# Allegro board BackUp.brd
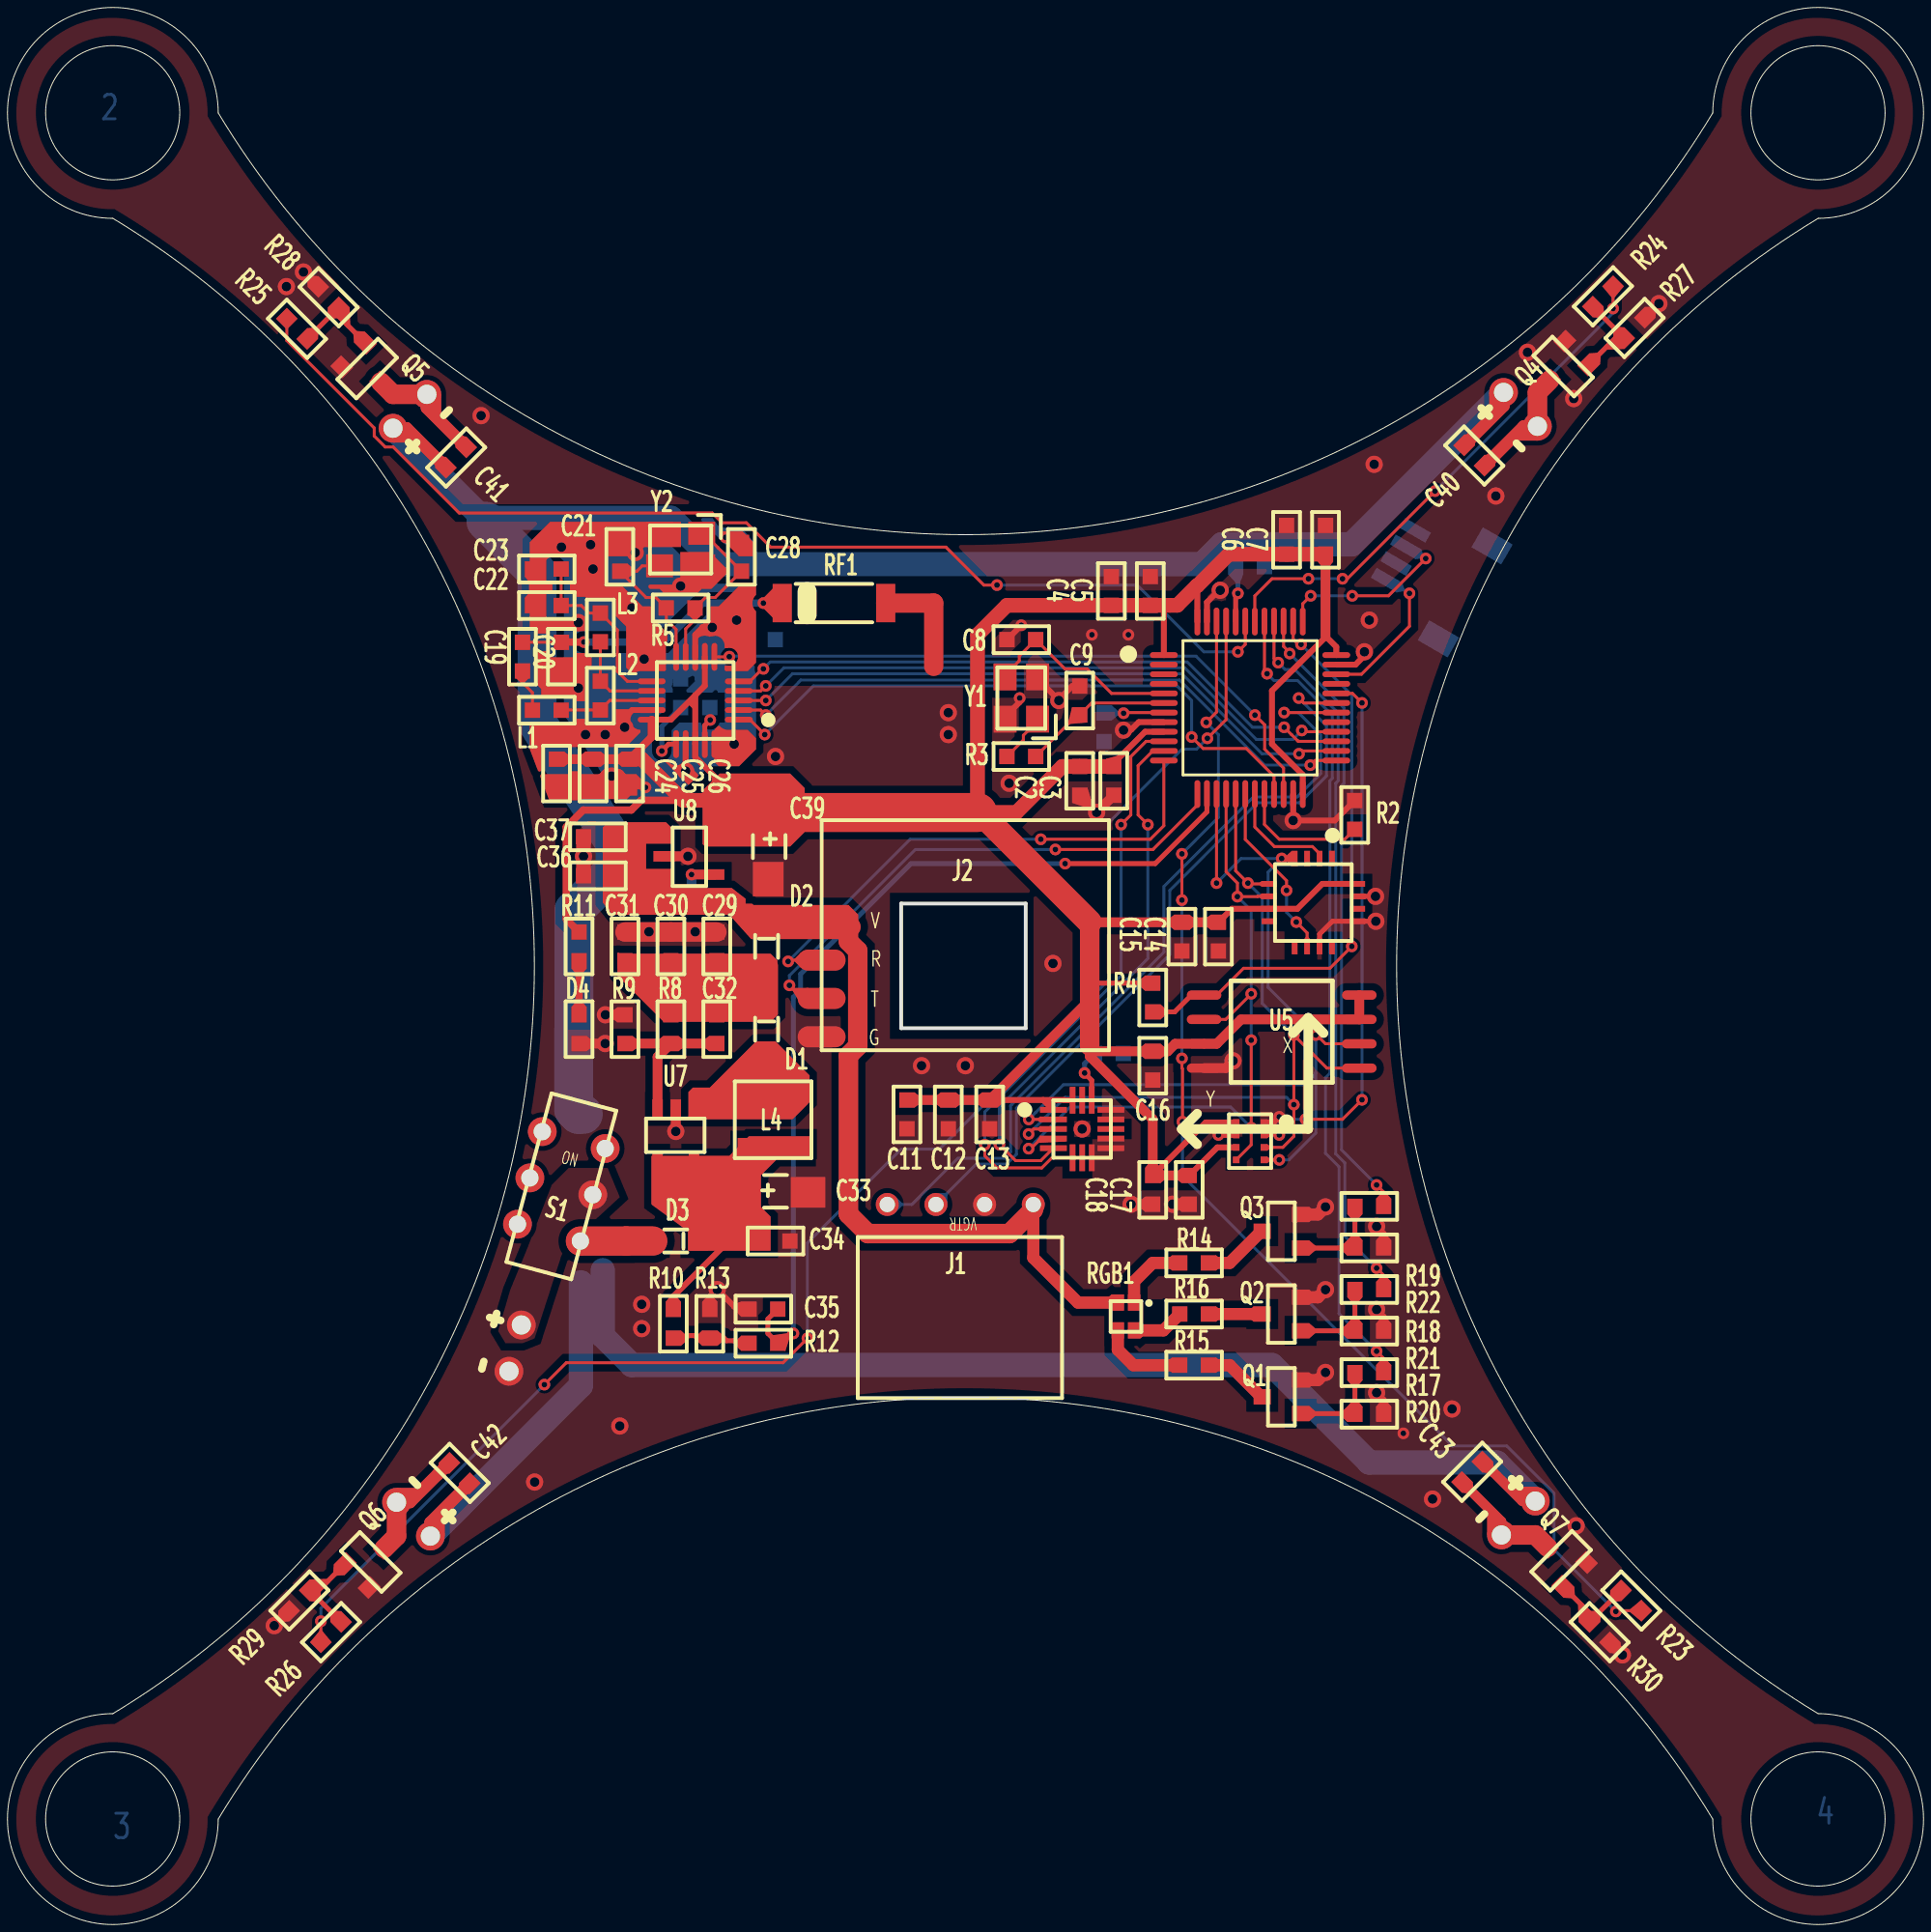
[diagram p0: board, top side]
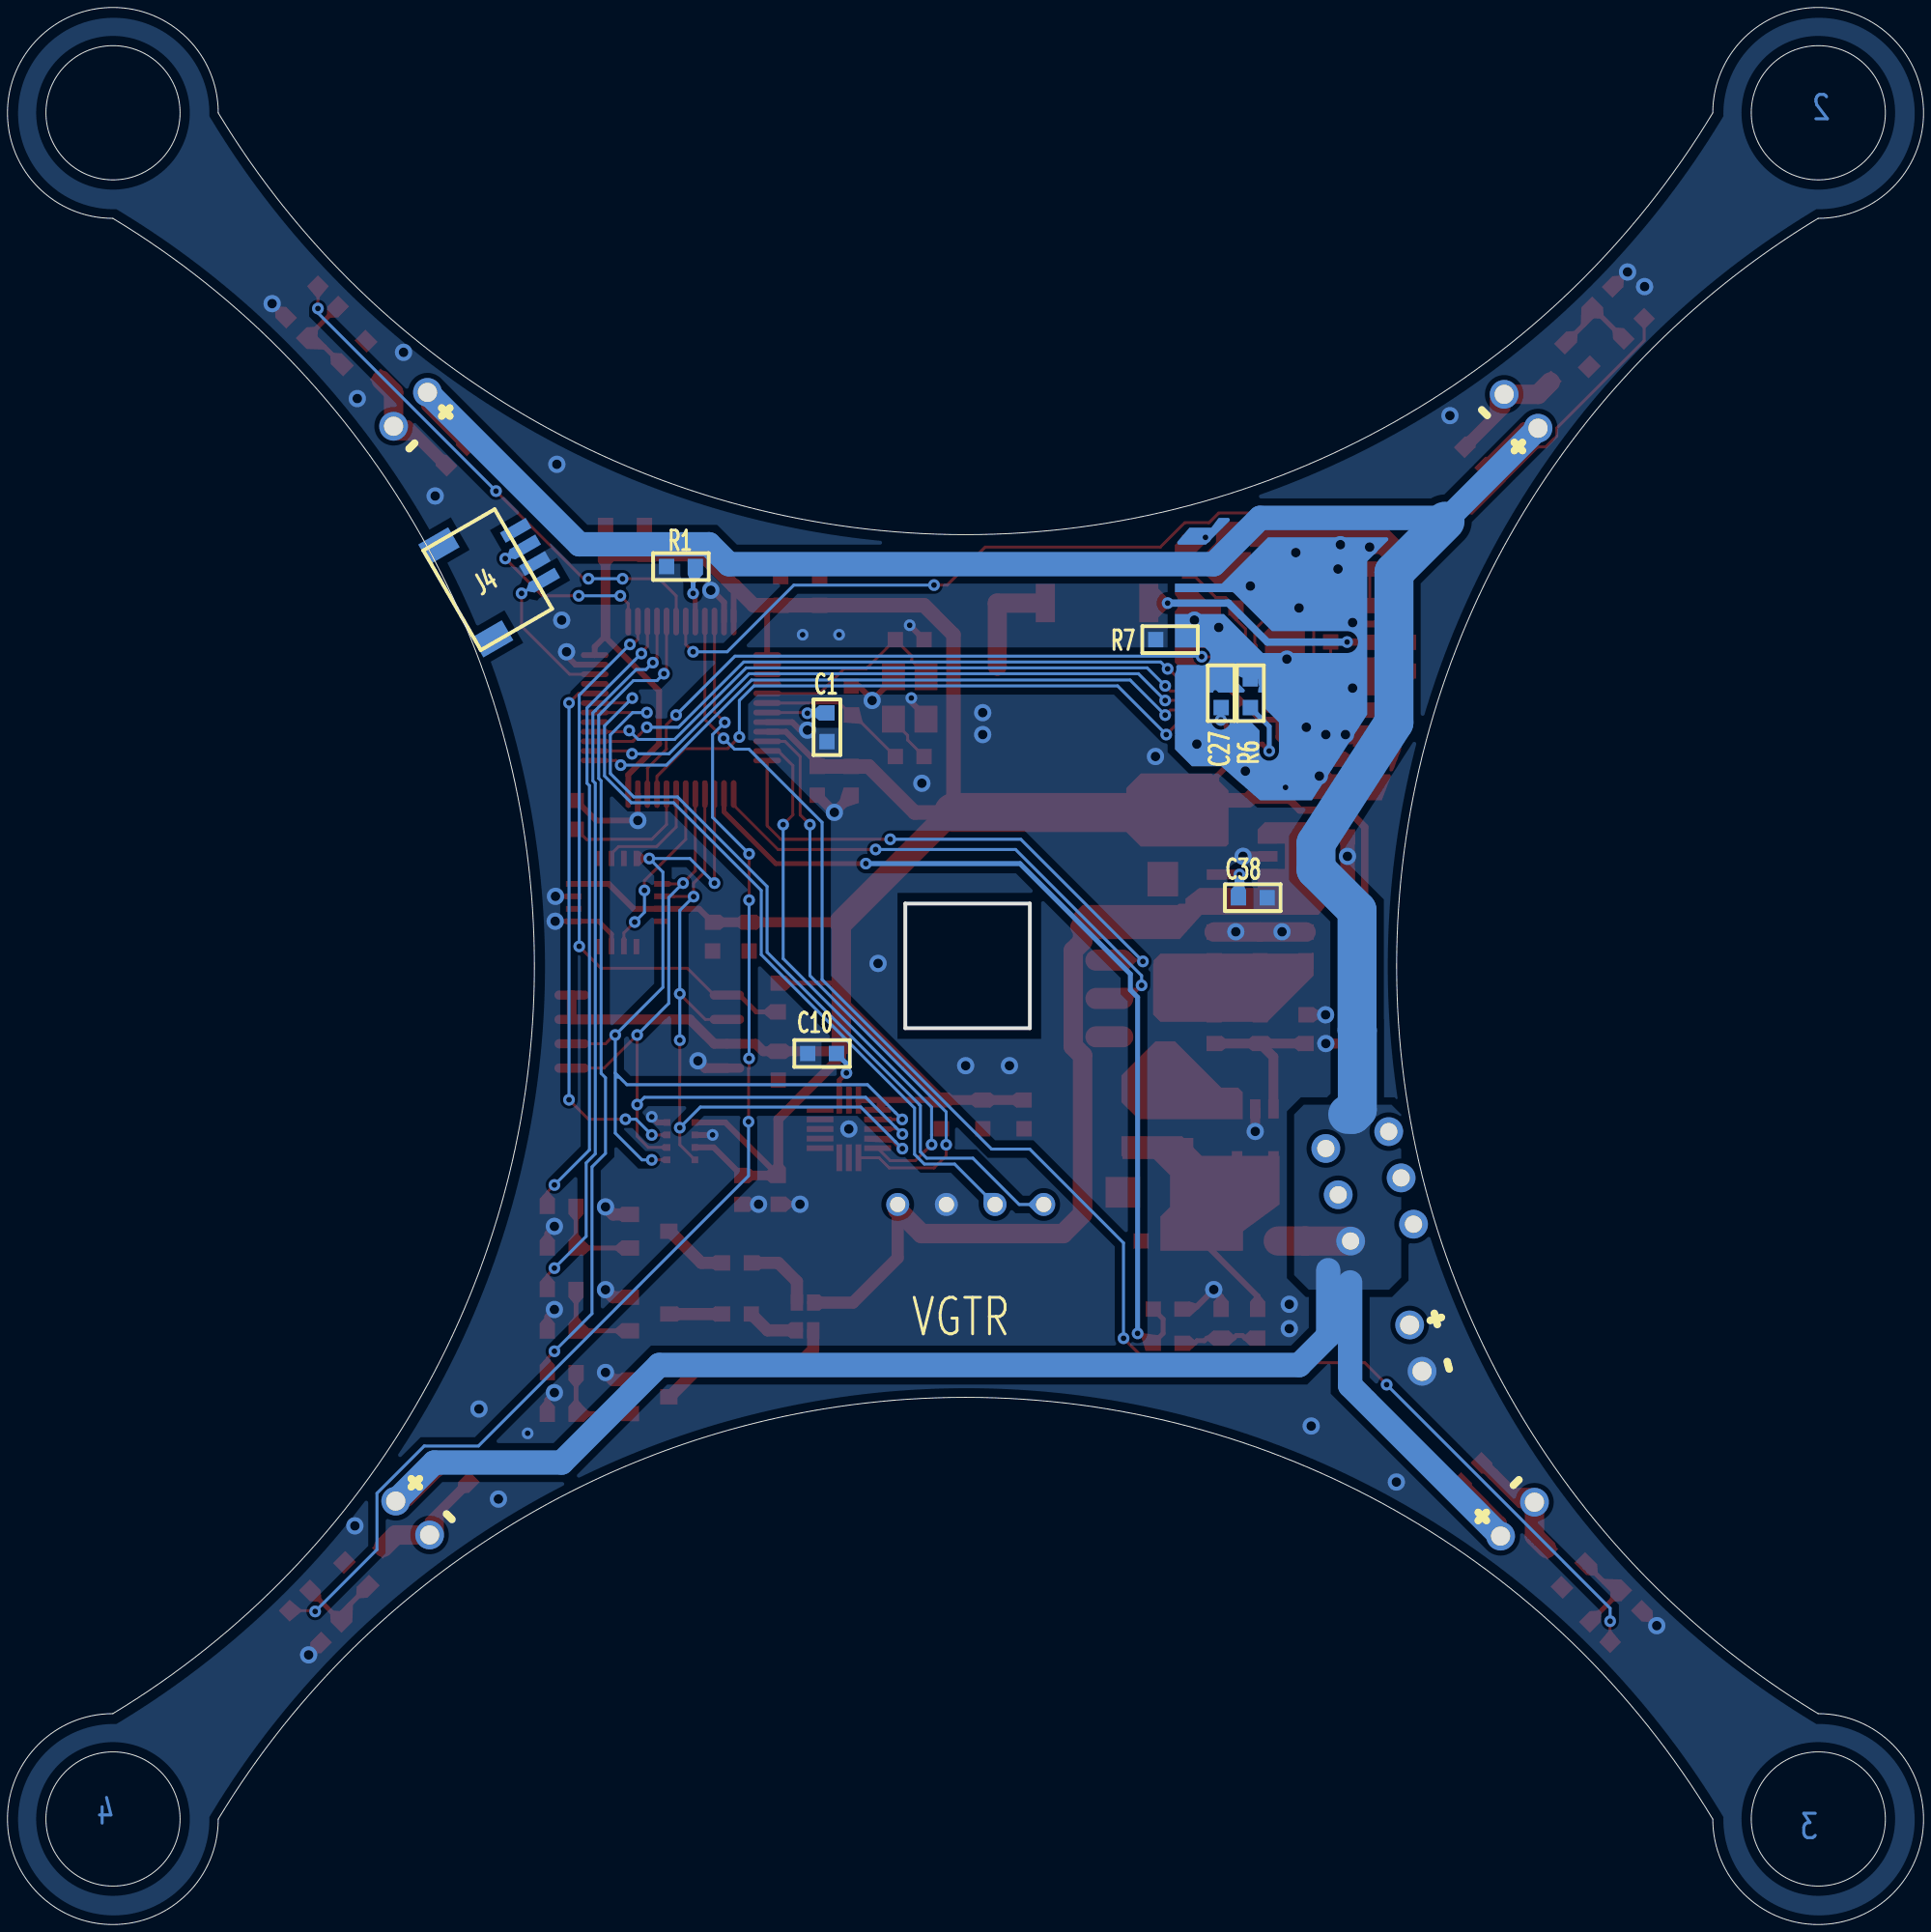
[diagram p1: board, bottom side, seen from below]

Outline 100 x 100 mm; copper layers: TOP, BOTTOM. Coordinates in mm from the lower left corner of the outline.
Outline path: circle c5.49,94.51 r3.5 ; circle c5.49,5.51 r3.5 ; circle c94.49,94.51 r3.5 ; circle c94.49,5.51 r3.5 ; 5.5,89 arc(27.5,50) 5.5,11 arc(1.61,1.61) 11,5.5 arc(50,27.5) 89,5.5 arc(98.39,1.61) 94.5,11 arc(72.5,50) 94.5,89 arc(98.39,98.39) 89,94.5 arc(50,72.5) 11,94.5 arc(1.61,98.39) 5.5,89

## Design rules (mm)
net group POWER: nets GND_SIGNAL VCC_3.3V VCC_5V VCC_IN

## Placement (name value [footprint] x y rotation side)
C1  100nF  [0603]  57.23 62.45 270 bottom
C2  1uF  [0603]  55.96 59.66 270 top
C3  100nF  [0603]  57.74 59.66 270 top
C4  10uF  [0603]  57.61 69.56 90 top
C5  100nF  [0603]  59.64 69.56 90 top
C6  100nF  [0603]  66.76 72.23 90 top
C7  100nF  [0603]  68.79 72.23 90 top
C8  20pF  [0603]  52.91 67.02 180 top
C9  20pF  [0603]  55.96 63.85 90 top
C10  100nF  [0603]  57.48 45.43 0 bottom
C11  2.2uF  [0603]  46.94 42.26 270 top
C12  100nF  [0603]  49.1 42.26 270 top
C13  10nF  [0603]  51.26 42.26 270 top
C14  10uF  [0603]  63.2 51.53 270 top
C15  100nF  [0603]  61.29 51.53 270 top
C16  1uF  [0603]  59.77 44.8 270 top
C17  100nF  [0603]  61.68 38.32 270 top
C18  10uF  [0603]  59.77 38.32 270 top
C19  1.5pF  [0603]  26.88 66.13 90 top
C20  1pF  [0603]  28.91 66.13 270 top
C21  22pF  [0603]  31.96 71.34 90 top
C22  2.2nF  [0603]  28.15 68.8 180 top
C23  4.7pF  [0603]  28.15 70.71 180 top
C24  10uF  [0603]  28.66 60.04 270 top
C25  10nF  [0603]  30.56 60.04 270 top
C26  1nF  [0603]  32.47 60.04 270 top
C27  33nF  [0603]  36.66 64.23 90 bottom
C28  22pF  [0603]  38.31 71.34 90 top
C29  100nF  [0603]  37.02 51.02 90 top
C30  2.2uF  [0603]  34.62 51.02 90 top
C31  10uF  [0603]  32.23 51.02 90 top
C32  22pF  [0603]  37.02 46.7 270 top
C33  T.47uF  [CASE-A-3216]  40.09 38.19 0 top
C34  100nF  [0603]  40.09 35.65 0 top
C35  100nF  [0603]  39.45 32.1 180 top
C36  100nF  [0603]  30.81 56.74 180 top
C37  4.7uF  [0603]  30.81 54.7 180 top
C38  100nF  [0603]  35.01 53.56 180 bottom
C39  T.10uF  [CASE-A-3216]  39.7 56.23 270 top
C40  10uF  [0603]  76.55 76.62 315 top
C41  10uF  [0603]  23.42 76.52 45 top
C42  10uF  [0603]  23.6 23.56 135 top
C43  10uF  [0603]  76.44 23.62 225 top
D1  B5819WS  [SOD-323]  39.62 46.7 90 top
D2  1N5819  [SOD-323]  39.62 51.02 90 top
D3  1N5819  [SOD-323]  34.88 35.65 0 top
D4  RED  [0603]  29.83 46.7 90 top
J1  Bluetooth  [A2541HWR-4P]  49.74 37.56 180 top
J2  Optical-Flow  [UP_FLOW]  49.99 50.01 0 top
J3  Power  [MOTOR]  26.5 30.07 75 top
J4  SWD  [SH1_0]  74.63 70.33 240 bottom
L1  3.9nH  [0603]  28.15 63.34 180 top
L2  8.2nH  [0603]  30.94 64.1 90 top
L3  2.7nH  [0603]  30.94 67.66 90 top
L4  4.7uH  [4_7UH]  39.96 40.48 90 top
M1  MOTOR1  [MOTOR]  78.96 79.04 135 top
M2  MOTOR2  [MOTOR]  21 78.93 225 top
M3  MOTOR3  [MOTOR]  21.19 21.14 315 top
M4  MOTOR4  [MOTOR]  78.85 21.2 45 top
NOREF  -  []  94.52 0 90 top
Q1  SI2310  [SOT23-3]  65.49 27.53 90 top
Q2  SI2310  [SOT23-3]  65.49 31.84 90 top
Q3  SI2310  [SOT23-3]  65.49 36.16 90 top
Q4  SI2310  [SOT23-3]  80.49 80.56 135 top
Q5  SI2310  [SOT23-3]  19.48 80.46 225 top
Q6  SI2310  [SOT23-3]  19.67 19.62 315 top
Q7  SI2310  [SOT23-3]  80.38 19.68 45 top
R1  10K  [0603]  64.85 70.83 0 bottom
R2  10K  [0603]  70.31 57.88 90 top
R3  1M  [0603]  52.91 60.93 180 top
R4  4.7K  [0603]  59.77 48.35 270 top
R5  1M  [0603]  35.13 68.67 0 top
R6  22K  [0603]  35.13 64.23 90 bottom
R7  0  [0603]  39.32 67.02 0 bottom
R8  33K  [0603]  34.62 46.7 270 top
R9  10K  [0603]  32.23 46.7 90 top
R10  2K 1%  [0603]  34.75 31.34 270 top
R11  1K  [0603]  29.83 51.02 270 top
R12  1K  [0603]  39.45 30.32 0 top
R13  1K 1%  [0603]  36.66 31.34 90 top
R14  R50  [0603]  61.93 34.51 0 top
R15  R50  [0603]  61.93 29.18 180 top
R16  R50  [0603]  61.93 31.84 0 top
R17  1K  [0603]  71.07 28.79 180 top
R18  1K  [0603]  71.07 33.12 180 top
R19  1K  [0603]  71.07 37.46 180 top
R20  10K  [0603]  71.07 26.62 0 top
R21  10K  [0603]  71.07 30.96 0 top
R22  10K  [0603]  71.07 35.29 0 top
R23  1K  [0603]  84.75 16.9 135 top
R24  1K  [0603]  83.27 84.93 225 top
R25  1K  [0603]  15.11 83.24 315 top
R26  1K  [0603]  16.89 15.25 45 top
R27  10K  [0603]  84.92 83.28 45 top
R28  10K  [0603]  16.76 84.89 135 top
R29  10K  [0603]  15.24 16.9 225 top
R30  10K  [0603]  83.1 15.25 315 top
RF1  2.4GHz  [RF1]  43.13 68.93 0 top
RGB1  RGB  [RGB1]  58.37 31.72 0 top
S1  SW2*3  [SW]  31.2 40.48 255 top
U1  STM32F103-LQFP48  [LQFP-48]  64.85 63.47 0 top
U2  ICM20602  [LGA-16]  56.09 41.5 0 top
U3  AK8975  [LQFP-16]  68.15 53.31 270 top
U4  SPL06-001  [LGA-8]  64.85 40.86 0 top
U5  W25Q32  [SOIC-8]  66.5 46.58 0 top
U6  nRF24L01+  [QFN-20]  35.89 63.85 180 top
U7  LM27313  [SOT23-5]  34.88 41.24 0 top
U8  MIC5219-3.3V  [SOT23-5]  35.51 55.72 90 top
Y1  8MHz  [8MHZ]  52.91 63.98 90 top
Y2  16MHz  [8MHZ]  35.13 71.72 180 top

## Library data of the parts
C1-C9 = CAP NP_0
C10-C32 C34-C38 = CAP NP_1
C33 C39 = CAP POL_0
C40-C43 = CAP NP
D1 = BZX84C16/SOT_0
D2 D3 = DIODE
D4 = LED
J1 J2 = HEADER 4
J3 M1-M4 = HEADER 2
J4 = HEADER 4_0
L1-L4 = INDUCTOR
Q1-Q7 = MOSFET N_0
R1-R3 = R_0
R4-R30 = R_1
RF1 = RF
RGB1 = RGB
S1 = SW2*3_1
U1 = STM32F103-LQFP48
U2 = ICM20602
U3 = AK8975
U4 = SPL06-001
U5 = W25Q32
U6 = nRF24L01+
U7 = LM27313
U8 = MIC5219-3.3V
Y1 Y2 = XL/SM

## Footprints (pads in the part's own frame, mm; a bottom-side part is the same pattern mirrored in y, then rotated)
4_7UH
  rect 1.1x3.7 smd: 1(0,0) 2(3,0)
8MHZ
  rect 1.4x1.2 smd: 1(-1.1,-0.85) 2(1.1,-0.85) 3(1.1,0.85) 4(-1.1,0.85)
0603
  rect 0.8x0.8 smd: 1(-0.75,0) 2(0.75,0)
A2541HWR-4P
  round 1.2 hole 0.8: 1(-3.8,0) 2(-1.26,0) 3(1.28,0) 4(3.82,0)
CASE-A-3216
  rect 1.8x1.6 smd: 1(-1.7,0) 2(1.7,0)
LGA-8
  rect 0.35x0.35 smd: 1(0.725,0.975) 2(0.725,0.325) 3(0.725,-0.325) 4(0.725,-0.975) 5(-0.725,-0.975) 6(-0.725,-0.325) 7(-0.725,0.325) 8(-0.725,0.975)
LGA-16
  rect 1.4x0.3 smd: 1(-1.5,1) 2(-1.5,0.5) 3(-1.5,0) 4(-1.5,-0.5) 5(-1.5,-1) 9(1.5,-1) 10(1.5,-0.5) 11(1.5,0) 12(1.5,0.5) 13(1.5,1)
  rect 0.3x1.4 smd: 6(-0.5,-1.5) 7(0,-1.5) 8(0.5,-1.5) 14(0.5,1.5) 15(0,1.5) 16(-0.5,1.5)
LQFP-16
  rect 0.8x0.3 smd: 1(-2.3,0.975) 2(-2.3,0.325) 3(-2.3,-0.325) 4(-2.3,-0.975) 9(2.3,-0.975) 10(2.3,-0.325) 11(2.3,0.325) 12(2.3,0.975)
  rect 0.3x0.8 smd: 5(-0.975,-2.3) 6(-0.325,-2.3) 7(0.325,-2.3) 8(0.975,-2.3) 13(0.975,2.3) 14(0.325,2.3) 15(-0.325,2.3) 16(-0.975,2.3)
LQFP-48
  oval 1.45x0.3 smd: 1(-4.5,2.75) 2(-4.5,2.25) 3(-4.5,1.75) 4(-4.5,1.25) 5(-4.5,0.75) 6(-4.5,0.25) 7(-4.5,-0.25) 8(-4.5,-0.75) 9(-4.5,-1.25) 10(-4.5,-1.75) 11(-4.5,-2.25) 12(-4.5,-2.75) 25(4.5,-2.75) 26(4.5,-2.25) 27(4.5,-1.75) 28(4.5,-1.25) 29(4.5,-0.75) 30(4.5,-0.25) 31(4.5,0.25) 32(4.5,0.75) 33(4.5,1.25) 34(4.5,1.75) 35(4.5,2.25) 36(4.5,2.75)
  oval 0.3x1.45 smd: 13(-2.75,-4.5) 14(-2.25,-4.5) 15(-1.75,-4.5) 16(-1.25,-4.5) 17(-0.75,-4.5) 18(-0.25,-4.5) 19(0.25,-4.5) 20(0.75,-4.5) 21(1.25,-4.5) 22(1.75,-4.5) 23(2.25,-4.5) 24(2.75,-4.5) 37(2.75,4.5) 38(2.25,4.5) 39(1.75,4.5) 40(1.25,4.5) 41(0.75,4.5) 42(0.25,4.5) 43(-0.25,4.5) 44(-0.75,4.5) 45(-1.25,4.5) 46(-1.75,4.5) 47(-2.25,4.5) 48(-2.75,4.5)
MOTOR
  round 1.5 hole 1: 1(-1.25,0) 2(1.25,0)
QFN-20
  oval 1.45x0.3 smd: 1(-2.275,1) 2(-2.275,0.5) 3(-2.275,0) 4(-2.275,-0.5) 5(-2.275,-1) 11(2.275,-1) 12(2.275,-0.5) 13(2.275,0) 14(2.275,0.5) 15(2.275,1)
  oval 0.3x1.45 smd: 6(-1,-2.275) 7(-0.5,-2.275) 8(0,-2.275) 9(0.5,-2.275) 10(1,-2.275) 16(1,2.275) 17(0.5,2.275) 18(0,2.275) 19(-0.5,2.275) 20(-1,2.275)
RF1
  rect 1x2 smd: 1(-2.7,0) 2(2.7,0)
RGB1
  rect 0.65x0.85 smd: 1(0.425,0.725) 2(0.425,-0.725) 3(-0.425,-0.725) 4(-0.425,0.725)
SH1_0
  rect 0.6x1.55 smd: 1(1.5,2.2) 2(0.5,2.2) 3(-0.5,2.2) 4(-1.5,2.2)
  rect 1.2x1.8 smd: 5(-2.8,-1.675) 6(2.8,-1.675)
SOD-323
  rect 1x1 smd: 1(1.2,0) 2(-1.2,0)
SOIC-8
  oval 1.8x0.48 smd: 1(-4.05,1.905) 2(-4.05,0.635) 3(-4.05,-0.635) 4(-4.05,-1.905) 5(4.05,-1.905) 6(4.05,-0.635) 7(4.05,0.635) 8(4.05,1.905)
SOT23-3
  rect 0.8x0.9 smd: 1(-0.875,-2) 2(0,0) 3(0.875,-2)
SOT23-5
  rect 0.55x1 smd: 1(0.95,1.3) 2(0,1.3) 3(-0.95,1.3) 4(-0.95,-1.4) 5(0.95,-1.4)
SW
  round 1.5 hole 0.9: 1(0,0) 2(2.5,0) 3(5,0) 4(0,-3.4) 5(2.5,-3.4) 6(5,-3.4)
UP_FLOW
  oval 2.5x1.1 smd: 1(-7.5,-3.7) 2(-7.5,-1.7) 3(-7.5,0.3) 4(-7.5,2.3)

## Nets
GND: C1.2 C2.2 C3.2 C4.2 C5.2 C6.2 C7.2 C8.2 C9.2 C10.2 C11.2 C12.2 C13.2 C14.2 C15.2 C16.2 C17.2 C18.2 C29.2 C30.2 C31.2 C33.2 C34.2 C35.2 C36.2 C37.2 C38.2 C39.2 D4.1(CATHODE) J1.2 J2.1 J3.1 J4.2 Q1.3(SOURCE) Q2.3(SOURCE) Q3.3(SOURCE) Q4.3(SOURCE) Q5.3(SOURCE) Q6.3(SOURCE) Q7.3(SOURCE) R1.2 R2.2 R7.2 R9.2 R13.2 R20.2 R21.2 R22.2 R27.2 R28.2 R29.2 R30.2 U1.8(VSSA) U1.23(VSS_1) U1.35(VSS_2) U1.47(VSS_3) U2.8(FSYNC) U2.9(RESV1) U2.10(RESV2) U2.12(RESV4) U2.13(GND) U2.15(RESV5) U3.11(CAD1) U3.13(CAD0) U3.15(VSS) U4.1(GND) U4.7(GND2) U5.4(GND) U7.2(GND) U8.2(GND) Y1.2 Y1.4
GND_SIGNAL: C20.2 C21.2 C22.2 C23.2 C24.2 C25.2 C26.2 C27.2 C28.2 R6.2 R7.1 U6.8(VSS) U6.14(VSS1) U6.17(VSS2) U6.20(DVSS) Y2.2 Y2.4
VCC_3.3V: C2.1 C3.1 C4.1 C5.1 C6.1 C7.1 C11.1 C12.1 C13.1 C14.1 C15.1 C16.1 C17.1 C18.1 C24.1 C25.1 C26.1 C39.1 R4.1 R11.1 U1.1(VBAT) U1.9(VDDA) U1.24(VDD_1) U1.36(VDD_2) U1.48(VDD_3) U2.1(VDDIO) U2.16(VDD) U3.7(VDDIO) U3.16(VDD) U4.6(VDDIO) U4.8(VDD) U5.3(W\P\) U5.7(H\O\L\D\) U5.8(VCC) U6.7(VDD) U6.15(VDD1) U6.18(VDD2) U8.5(OUT)
VCC_5V: C36.1 C37.1 D2.1(K) J1.1 J2.4 RGB1.4(VCC) U8.1(IN) U8.3(EN)
VCC_BATT: J3.2 S1.2
VCC_IN: C33.1 C34.1 D3.1(K) L4.1 R10.1 U7.4(SD) U7.5(VIN)
VCC_MO: C40.1 C41.1 C42.1 C43.1 D3.2(A) M1.2 M2.2 M3.2 M4.2 S1.3
2: RF1.2
5: J4.5
6: J4.6
AK8975_CS: U1.19(PB1,ADC12_IN9,TIM3_CH4) U3.2(C\S\)
DRDY: U1.18(PB0,ADC12_IN8,TIM3_CH3) U3.10(DRDY)
FLASH_CS: R4.2 U1.38(PA15) U5.1(C\S\)
ICM20602_CS: U1.11(PA1,USART2_RTS,ADC12_IN1,TIM2_C) U2.5(C\S\)
ICM20602_INT: U1.10(PA0,USART2_CTS,ADC12_IN0,TIM2_C) U2.6(INT)
NRF_CE: U1.21(PB10,I2C2_SCL,USART3_TX) U6.1(CE)
NRF_CS: U1.25(PB12,SPI2_NSS,I2C2_SMBAI,USART3) U6.2(C\S\)
NRF_INT: U1.22(PB11,I2C2_SDA) U6.6(IRQ)
OSC_IN: C8.1 U1.5(OSC_IN) Y1.3
OSC_OUT: C9.1 R3.1 U1.6(OSC_OUT)
POWER_MEASURE: C35.1 R12.2 U1.14(PA4,SPI1_NSS,USART2_CK,ADC12_IN)
RGB_B: R17.1 U1.41(PB5,I2C1SMBAI)
RGB_G: R18.1 U1.40(PB4)
RGB_R: R19.1 U1.39(PB3)
SPI1_MISO: U1.16(PA6,SPI1_MISO,ADC12_IN6,TIM3_CH) U2.4(SDO) U3.6(SDO) U4.5(SDO) U5.2(SDO)
SPI1_MOSI: U1.17(PA7,SPI1_MOSI,ADC12_IN7,TIM3_CH) U2.3(SDI) U3.5(SDI) U4.3(SDI) U5.5(SDI)
SPI1_SCK: U1.15(PA5,SPI1_SCK,ADC12_IN5) U2.2(SCK) U3.4(SCK) U4.4(SCK) U5.6(SCK)
SPI2_MISO: U1.27(PB14,SPI2_MISO,TIM1_CH2N) U6.5(MISO)
SPI2_MOSI: U1.28(PB15,SPI2_MOSI,TIM1_CH3N) U6.4(MOSI)
SPI2_SCK: U1.26(PB13,SPI2_SCK,TIM1_CH1N) U6.3(SCK)
SPL06_CS: U1.32(PA11,CANRX,USBDM,TIM1_CH4) U4.2(C\S\)
SWCLK: J4.3 U1.37(PA14,SWCLK)
SWDIO: J4.1 U1.34(PA13,SWDIO)
TIM4_CH1: R24.1 U1.42(PB6,I2C1_SCL,TIM4_CH1)
TIM4_CH2: R25.1 U1.43(PB7,I2C1_SDA,TIM4_CH2)
TIM4_CH3: R26.1 U1.45(PB8,TIM4_CH3)
TIM4_CH4: R23.1 U1.46(PB9,TIM4_CH4)
U1_RX: J1.3 U1.31(PA10,USART1_RX,TIM1_CH3)
U1_TX: J1.4 U1.30(PA9,USART1_TX,TIM1_CH2)
U2_RX: J2.2 U1.13(PA3,USART2_RX,ADC12_IN3,TIM2_CH)
U2_TX: J2.3 U1.12(PA2,USART2_TX,ADC12_IN3,TIM2_CH)
N03518: C1.1 U1.7(NRST)
N03718: R1.1 U1.44(BOOT0)
N03722: R2.1 U1.20(PB2,BOOT1)
N09075: C10.1 U2.14(REGOUT)
N14044: R6.1 U6.16(IREF)
N15484: L1.1 L2.1 U6.13(ANT2)
N15573: C19.1 L1.2
N15577: C19.2 C20.1 RF1.1
N15609: L2.2 L3.1 U6.12(ANT1)
N15655: C22.1 C23.1 L3.2 U6.11(VDDPA)
N16481: C21.1 R5.1 U6.10(XC1) Y2.3
N16490: C28.1 R5.2 U6.9(XC2) Y2.1
N18033: D1.2(ANODE) L4.2 U7.1(SW)
N18173: C29.1 C30.1 C31.1 C32.1 D1.1(CATHODE) D2.2(A) R8.1
N18180: C32.2 R8.2 R9.1 U7.3(FB)
N19990: C38.1 U8.4(BYP)
N023291: R3.2 Y1.1
N24226: Q2.2(DRAIN) R16.2
N24231: Q3.2(DRAIN) R14.2
N24395: Q2.1(GATE) R18.2 R21.1
N24464: Q1.2(DRAIN) R15.1
N25221: Q4.1(GATE) R24.2 R27.1
N25353: C40.2 M1.1 Q4.2(DRAIN)
N25363: C41.2 M2.1 Q5.2(DRAIN)
N25852: C42.2 M3.1 Q6.2(DRAIN)
N25929: C43.2 M4.1 Q7.2(DRAIN)
N30919: R10.2 R12.1 R13.1
N237271: D4.2(ANODE) R11.2
N239990: R14.1 RGB1.1(R)
N239991: R16.1 RGB1.2(G)
N239992: R15.2 RGB1.3(B)
N241640: Q1.1(GATE) R17.2 R20.1
N241820: Q3.1(GATE) R19.2 R22.1
N249670: Q5.1(GATE) R25.2 R28.1
N249850: Q6.1(GATE) R26.2 R29.1
N250030: Q7.1(GATE) R23.2 R30.1
N1269217: C27.1 U6.19(DVDD)

Pads without a net: J4 4; S1 1 4 5 6; U1 2 3 4 29 33; U2 7 11; U3 1 3 8 9 12 14

## Via types
v1: diameter 0.61, hole 0.3, TOP to BOTTOM, 89 vias
v2: diameter 0.9, hole 0.5, TOP to BOTTOM, 68 vias

## Routing (per net, layer and track width the routed paths; a pad name or vN(x,y) marks a point on that pad's centre or on a via; arc(x,y) is an arc through that point)
GND: length 56.9
  TOP w0.254: U3.15 v2(71.4,53.63) ; R30.2 v2(84.28,14.06) ; U3.11 68.48,51.66 69.15,52.33 U3.13 v2(71.41,52.33) ; R29.2 v2(13.92,15.59) ; R27.2 v2(86.19,84.55) ; R28.2 v2(15.45,86.2)
  TOP w0.305: v1(66.37,42.13) 66.37,42.13 66.08,41.84 U4.1 ; R21.2 71.82,31.71 v2(71.45,32.08) ; R13.2 36.66,32.73 v2(37.04,33.12) 37.93,32.23 38.57,32.23 C35.2 ; U1.23 v2(67.1,57.59) 69.27,57.59 R2.2 ; Y1.4 52.06,63 52.83,63.76 v1(52.83,63.98) ; C8.2 v1(52.91,67.77) ; C18.2 v2(58.64,37.57) ; v2(54.87,63.85) 54.87,63.9 ; 54.87,63.9 55.57,64.6 C9.2 ; 54.87,63.9 54.84,63.9 53.76,64.98 Y1.2 ; R20.2 71.82,27.37 v2(71.45,27.74) ; v2(71.45,36.42) 71.82,36.05 R22.2 ; U4.7 v1(63.2,41.19) ; C17.2 v2(60.8,37.57) ; v2(58.25,62.3) 58.27,62.32 58.65,62.32 59.04,62.72 U1.8 ; v2(63.29,69.6) 63.23,69.6 62.6,68.97 U1.47 ; v2(70.82,66.39) 70.82,66.18 70.35,65.72 U1.35
  TOP w0.508: U8.2 v2(35.51,55.72) ; D4.1 v2(31.2,45.95) ; C3.2 v2(56.84,58.01) 55.96,58.9 C2.2 ; v2(63.96,45.05) 63.58,44.67 U5.4 ; R9.2 v2(31.21,47.45) ; U7.2 v2(34.88,41.37)
  TOP w0.635: v2(68.79,37.43) 68.39,37.04 Q3.3 ; v2(68.79,33.11) 68.39,32.72 Q2.3 ; Q1.3 68.39,28.4 v2(68.79,28.8)
  TOP w0.762: C37.2 v2(30.06,55.72) C36.2
  TOP w1.016: C31.2 C30.2 C29.2
  vias: v1(56.6,67.28) v1(58.5,67.28) v1(72.85,25.62) v2(14.56,85.44) v2(24.72,78.71) v2(27.51,23.08) v2(31.96,26) v2(33.1,32.35) v2(33.1,31.08) v2(33.48,51.78) v2(35.89,51.78) v2(40.09,60.93) v2(47.71,44.8) v2(49.1,63.21) v2(49.1,62.07) v2(49.99,44.8) v2(52.28,59.53) v2(54.56,50.13) v2(56.09,41.5) v2(71.07,68.04) v2(71.33,76.17) v2(74.38,22.19) v2(75.39,26.89) v2(77.68,74.52) v2(79.33,82.01) v2(81.74,79.6) v2(81.87,20.8)
GND_SIGNAL: length 21.3
  TOP w0.254: 33.93,72.57 33.77,72.57 v2(32.76,71.56) 32.69,71.56 32.66,71.54 32.51,71.54 C21.2 ; v1(37.48,72.36) 38.05,72.36 38.31,72.1 C28.2 ; v2(35.13,69.82) 35.13,69.87 36.13,70.87 Y2.4
  TOP w0.305: v2(32.21,62.45) 32.21,62.96 32.6,63.35 U6.14 ; U6.17 v2(35.39,60.17) ; U6.8 35.89,67.28 36.28,67.66 ; U6.20 v2(37.93,61.57)
  TOP w0.356: C22.2 C23.2 28.54,71.85 v2(28.91,71.85) ; 36.28,67.66 v2(36.78,67.66) ; C20.2 v2(29.8,64.5)
  TOP w0.762: C24.2 C25.2 30.7,59.29 31.32,59.91 v2(31.53,59.91) 31.83,59.91 31.85,59.88 31.86,59.88 32.45,59.29 C26.2
  vias: v1(33.3,59.31) v2(29.8,67.91) v2(30.17,62.07) v2(30.43,71.98) v2(30.56,70.71) v2(31.2,62.07) v2(32.59,68.67) v2(33.23,66.01) v2(38.05,68.04)
VCC_3.3V: length 187.8
  TOP w0.254: R4.1 56.49,49.1 56.48,49.12
  TOP w0.305: U6.7 36.39,64.62 35.89,64.12 ; U1.36 69.35,66.65 68.79,67.21 68.79,67.15 65.99,64.36 65.99,61.58 67.6,59.97 U1.24 ; C18.1 62.53,41.84 U4.8 ; 36.91,59.53 36.91,59.88 35.89,60.89 U6.18 35.89,64.12 ; U6.15 34.62,62.85 35.89,64.12 ; U1.9 59.37,62.22 57.74,60.58 C3.1 ; U4.6 63.14,40.54 C17.1 ; U1.1 60.35,68.5 60.66,68.81 ; U1.48 62.1,69.83 ; 54.06,43.01 54.57,42.5 U2.1 ; 54.06,43.01 55.15,43.01 55.16,43 U2.16 ; 54.06,43.01 C13.1 ; U3.16 68.62,54.28 67.32,52.98 U3.7 63.9,52.98 C14.1
  TOP w0.381: R11.1 29.16,52.44 29.16,57.24 30.05,58.13 32.56,58.13 33.07,58.64 35.26,58.64
  TOP w0.406: U6.15 33.62,61.94 C26.1
  TOP w0.508: C11.1 C12.1 C13.1 56.48,48.23 ; C24.1 C25.1 C26.1 ; 68.79,67.21 C7.1 ; C14.1 C15.1 56.48,52.28 56.47,52.29 ; C17.1 C18.1 59.77,42 56.48,45.29 56.48,45.83 56.76,45.55 C16.1 60.55,45.55 60.94,45.94 U5.3 63.11,45.94 64.38,47.21 U5.7 U5.8
  TOP w0.762: C7.1 C6.1 63.75,71.48 62.1,69.83 62.07,69.83 61.05,68.81 C5.1 C4.1 52.16,68.81 50.63,67.28 50.63,58.01 ; 36.53,58.64 35.26,58.64 33.11,60.79 C26.1 ; C3.1 C2.1 55.05,60.41 52.65,58.01 50.75,58.01
  TOP w1.016: 56.48,45.83 56.48,52.28
  TOP w1.27: 50.63,58.01 50.75,58.01 56.47,52.29
  TOP w2.032: 50.63,58.01 41.65,58.01
VCC_5V: length 34.2
  TOP w0.635: RGB1.4 55.87,32.44 53.54,34.78 53.54,37.29
  TOP w1.016: J1.1 53.54,37.29 52.29,36.04 44.9,36.04 43.89,37.06 43.89,45.33 44.38,45.81 44.38,50.8 43.89,51.28 43.89,51.9 44.02,52.04
VCC_IN: length 4.3
  TOP w0.305: R10.1 34.75,32.77 37.26,35.27 37.29,35.27
VCC_MO: length 189.7
  TOP w0.508: M4.2 79.05,22.09 77.54,23.59 77.52,23.59 C43.1
  TOP w0.635: C41.1 20.83,78.05 M2.2 ; C40.1 78.08,79.21 M1.2 ; C42.1 22.07,20.97 M3.2
  TOP w1.524: D3.2 32.29,35.65 32.29,35.65 S1.3
  BOTTOM w1.27: M3.2 29.93,28.11 29.93,33.5 ; M2.2 24.97,73.2 25.15,73.37 34.62,73.37 37.04,70.96 62.35,70.96 63.38,72 70.15,72 M1.2 ; M4.2 77.73,24.1 71.07,24.1 65.99,29.18 32.59,29.18 31.07,30.7 31.07,34.13
  BOTTOM w2.032: 30.05,42.26 29.8,42.26 29.55,42.51 29.55,46.63 29.56,46.65 29.56,52.9 31.71,55.04 31.71,56.4 27.64,62.71 27.64,70.53 24.97,73.2
2: length 5.8
  TOP w1: RF1.2 48.34,68.93 48.34,65.63
AK8975_CS: length 5.9
  TOP w0.152: U1.19 65.1,57.25 66.12,56.23 68.11,56.23 68.48,55.86 U3.2
DRDY: length 9.3
  TOP w0.152: U3.10 67.83,51.73 v1(67.26,52.29) ; v1(66.76,53.94) 66.76,54.45 64.6,56.61 U1.18
  BOTTOM w0.152: v1(66.76,53.94) 66.76,52.8 v1(67.26,52.29)
FLASH_CS: length 30.1
  TOP w0.152: v1(70.16,51.02) 69.02,49.88 64.51,49.88 63.11,48.48 U5.1 ; v1(67.51,66.77) 67.37,66.77 67.1,67.04 U1.38
  TOP w0.254: R4.2 60.91,47.6 61.79,48.48 U5.1
  BOTTOM w0.152: v1(70.16,51.02) 70.16,64.13 v1(67.51,66.77)
ICM20602_CS: length 28.3
  TOP w0.152: v1(59.52,57.37) 59.01,57.88 59.01,60.45 59.78,61.22 U1.11 ; v1(51.77,40.68) 52.13,40.32 52.14,40.32 52.61,39.85 53.93,39.85 54.58,40.5 U2.5
  BOTTOM w0.152: v1(59.52,57.37) 59.52,50.39 51.77,42.64 51.77,41.19 v1(51.77,40.68)
ICM20602_INT: length 31.1
  TOP w0.152: v1(51.01,40.68) 51.01,40.1 51.64,39.46 53.98,39.46 54.51,40 U2.6 ; U1.10 59.42,61.72 58.63,60.92 58.63,57.88 v1(58.12,57.37)
  BOTTOM w0.152: v1(51.01,40.68) 51.01,42.39 53.28,44.66 58.12,49.5 v1(58.12,57.37)
NRF_CE: length 33.3
  TOP w0.152: U1.21 66.1,59.9 64.65,61.34 62.4,61.34 62.16,61.58 v1(61.8,61.94) ; U6.1 38.74,62.85 v1(39.52,62.07)
  BOTTOM w0.152: v1(61.8,61.94) 61.8,63.85 61.04,64.61 42.06,64.61 v1(39.52,62.07)
NRF_CS: length 34
  TOP w0.152: U6.2 39.32,63.35 v1(39.58,63.09) ; U1.25 68.24,60.72 68,60.48 v1(67.99,60.48)
  BOTTOM w0.152: v1(67.99,60.48) 65.6,60.48 61.17,64.92 41.41,64.92 v1(39.58,63.09)
NRF_INT: length 34.2
  TOP w0.152: U1.22 66.6,60.32 65.61,61.31 65.61,62.58 v1(65.1,63.09) ; v1(37.67,66.13) 37.66,66.12 U6.6
  BOTTOM w0.152: v1(37.67,66.13) 37.7,66.16 62.03,66.16 v1(65.1,63.09)
OSC_IN: length 10.5
  TOP w0.152: Y1.3 52.06,65.18 52.81,65.92 52.81,66.17 C8.1 55.19,65.5 56.34,65.5 57.62,64.22 U1.5
OSC_OUT: length 7.8
  TOP w0.152: R3.1 55.83,63.1 C9.1 56.58,63.72 U1.6
POWER_MEASURE: length 47.8
  TOP w0.254: U1.14 62.6,58.04 59.9,55.34 v1(55.2,55.34) ; C35.1 39.69,31.58 39.69,30.83 R12.2 40.33,30.45 40.46,30.45 40.84,30.83 v1(41.02,30.83)
  BOTTOM w0.254: v1(41.02,30.83) 41.02,48.37 41.39,48.75 41.39,49.58 47.15,55.34 v1(55.2,55.34)
RGB_B: length 42.8
  TOP w0.152: U1.41 65.6,65.46 65.74,65.32 v1(65.74,65.25) ; v1(71.45,29.9) 71.82,29.53 R17.1
  BOTTOM w0.152: v1(65.74,65.25) 66.1,64.89 67.33,64.89 69.14,63.07 69.14,59.79 69.02,59.66 69.02,44.4 68.79,44.17 68.79,40.23 69.49,39.52 69.49,31.86 v1(71.45,29.9)
RGB_G: length 37.6
  TOP w0.152: U1.40 66.1,66.04 v1(66.32,65.82) ; v1(71.45,34.24) 71.82,33.87 R18.1
  BOTTOM w0.152: v1(71.45,34.24) 69.8,35.9 69.8,39.73 69.32,40.2 69.32,59.53 69.45,59.66 69.45,63.2 69.32,63.33 67.18,65.46 66.68,65.46 v1(66.32,65.82)
RGB_R: length 32.8
  TOP w0.152: U1.39 66.6,66.67 66.91,66.36 66.91,66.31 v1(66.92,66.3) ; R19.1 71.82,38.21 v1(71.45,38.58)
  BOTTOM w0.152: v1(66.92,66.3) 67.28,65.94 69.75,63.46 69.75,59.53 69.62,59.41 69.62,40.4 v1(71.45,38.58)
SPI1_MISO: length 39.1
  TOP w0.152: v1(64.91,46.13) v1(64.91,41.56) 64.91,40.67 U4.5 ; U1.16 63.6,54.91 64.19,54.32 v1(64.19,53.62) 65.23,53.62 65.25,53.63 U3.6 ; U2.4 53.94,41 53.41,40.47 v1(53.29,40.47) ; U5.2 63.58,47.21 64.91,48.54 v1(64.91,48.55)
  BOTTOM w0.152: v1(64.91,46.13) v1(64.91,48.55) 64.91,52.9 v1(64.19,53.62) ; v1(64.91,41.56) 63.83,42.64 55.46,42.64 v1(53.29,40.47)
SPI1_MOSI: length 42.4
  TOP w0.152: U1.17 64.1,54.96 v1(64.74,54.32) 64.85,54.32 64.89,54.28 U3.5 ; U5.5 68.86,44.67 v1(67.14,46.4) v1(67.14,42.77) 67.14,41.12 66.56,40.54 U4.3 ; U2.3 53.55,41.5 53.29,41.24 v1(53.29,41.23)
  BOTTOM w0.152: v1(64.74,54.32) 65.49,53.58 65.49,48.05 v1(67.14,46.4) ; v1(67.14,42.77) 66.76,43.15 55.21,43.15 53.65,41.59 v1(53.29,41.23)
SPI1_SCK: length 48
  TOP w0.152: U5.6 68.79,45.94 68.28,46.45 v1(68.28,46.4) ; v1(66.5,55.61) U3.4 ; U1.15 v1(63.1,54.32) ; U4.4 v1(66.37,39.89) ; v1(53.3,42) 53.3,42 U2.2
  BOTTOM w0.152: v1(53.3,42) 53.66,42.36 55.11,43.81 67.67,43.81 68.28,44.42 ; 68.28,44.42 68.28,41.28 66.88,39.89 v1(66.37,39.89) ; 68.28,44.42 v1(68.28,46.4) 65.79,48.89 65.79,54.9 v1(66.5,55.61) 64.38,55.61 v1(63.1,54.32)
SPI2_MISO: length 33.3
  TOP w0.152: v1(66.63,62.45) 67.02,62.06 67.36,61.72 U1.27 ; U6.5 38.74,64.85 39.4,65.5 v1(39.45,65.5)
  BOTTOM w0.152: v1(66.63,62.45) 64.98,62.45 61.57,65.86 39.81,65.86 v1(39.45,65.5)
SPI2_MOSI: length 33.4
  TOP w0.152: U6.4 39.32,64.35 39.58,64.61 v1(39.58,64.61) ; U1.28 67.62,62.22 v1(67.55,62.28)
  BOTTOM w0.152: v1(67.55,62.28) 67.08,61.82 65.18,61.82 61.45,65.55 40.52,65.55 v1(39.58,64.61)
SPI2_SCK: length 33.6
  TOP w0.152: v1(67.4,61.07) 67.55,61.22 U1.26 ; U6.3 v1(39.58,63.85)
  BOTTOM w0.152: v1(39.58,63.85) 40.97,65.25 61.29,65.25 65.47,61.07 v1(67.4,61.07)
SPL06_CS: length 28.1
  TOP w0.152: v1(67.75,42) 69.68,42 v1(70.69,43.02) ; U4.2 v1(66.37,41.19) ; U1.32 70.2,64.22 v1(70.69,63.72)
  BOTTOM w0.152: v1(67.75,42) 67.19,42 v1(66.37,41.19) ; v1(70.69,43.02) v1(70.69,63.72)
SWCLK: length 9.5
  TOP w0.152: v1(68.01,69.31) 67.6,68.9 U1.37 ; v1(74.02,71.25) 72.07,69.31 v1(70.18,69.31)
  BOTTOM w0.152: v1(74.02,71.25) 73.96,71.25 73.87,71.34 72.97,71.86 J4.3 ; v1(70.18,69.31) v1(68.01,69.31)
SWDIO: length 8
  TOP w0.152: U1.34 70.66,65.22 73.17,67.72 v1(73.17,69.44)
  BOTTOM w0.152: J4.1 72.96,69.56 72.98,69.56 73.11,69.44 v1(73.17,69.44)
TIM4_CH1: length 27.5
  TOP w0.152: v1(74.5,74.77) 69.93,70.2 v1(69.68,70.2) ; R24.1 v1(83.8,84.3) ; U1.42 65.1,69.31 65.99,70.2 v1(67.9,70.2)
  BOTTOM w0.152: v1(83.8,84.3) 83.8,84.06 v1(74.5,74.77) ; v1(69.68,70.2) v1(67.9,70.2)
TIM4_CH2: length 59.5
  TOP w0.152: v1(64.22,66.39) 64.6,66.77 U1.43 ; R25.1 14.58,82.62 19.14,78.06 19.14,77.65 19.71,77.07 20.13,77.07 23.58,73.63 36.78,73.63 37.29,73.12 38.56,73.12 39.83,71.85 48.98,71.85 50.96,69.87 v1(51.64,69.87)
  BOTTOM w0.152: v1(64.22,66.39) 62.44,66.39 58.96,69.87 v1(51.64,69.87)
TIM4_CH3: length 81.1
  TOP w0.152: v1(41.75,30.58) 40.48,29.3 29.16,29.3 v1(28.02,28.16) ; U1.45 63.6,62.85 v1(62.62,61.88) ; R26.1 v1(16.36,15.82)
  BOTTOM w0.152: v1(41.75,30.58) 41.75,35.55 46.64,40.45 48.64,40.45 57.48,49.29 57.48,57.49 61.3,61.31 62.06,61.31 v1(62.62,61.88) ; v1(28.02,28.16) 16.36,16.5 v1(16.36,15.82)
TIM4_CH4: length 65.3
  TOP w0.152: v1(61.29,45.18) 61.29,44.67 61.32,44.64 v1(61.32,41.88) ; v1(83.94,16.33) 83.98,16.37 R23.1 ; v1(62.56,62.71) 63.1,63.24 U1.46 ; v1(61.29,53.43) 61.29,54.96 61.3,54.96 61.3,55.34 61.29,55.34 v1(61.29,55.85)
  BOTTOM w0.152: v1(83.94,16.33) 80.71,19.56 80.71,22.49 78.25,24.96 75.42,24.96 61.32,39.06 v1(61.32,41.88) ; v1(61.29,55.85) 61.3,55.85 61.47,56.01 61.47,56.02 63.2,57.75 63.2,62.07 v1(62.56,62.71) ; v1(61.29,53.43) v1(61.29,45.18)
U1_RX: length 39.7
  TOP w0.152: v1(67.39,63.98) 67.65,63.72 U1.31
  BOTTOM w0.152: J1.3 50.57,39.67 52.15,39.67 52.66,40.18 52.66,42.59 60.66,50.59 60.66,53.94 65.23,58.51 67.44,58.51 68.84,59.91 68.84,62.53 v1(67.39,63.98)
U1_TX: length 42.5
  TOP w0.152: U1.30 v1(66.63,63.22)
  BOTTOM w0.152: v1(66.63,63.22) 67.37,63.22 68.53,62.06 68.53,60.04 67.31,58.82 65.03,58.82 60.35,54.15 60.35,50.72 52.35,42.72 52.35,40.3 52.02,39.97 49.61,39.97 47.2,37.56 J1.4
U2_RX: length 28
  TOP w0.152: v1(54.69,56.08) 59.78,56.08 62.1,58.39 U1.13 ; J2.2 41.49,48.31 v1(40.81,48.99)
  BOTTOM w0.152: v1(40.81,48.99) 40.81,49.5 47.39,56.08 v1(54.69,56.08)
U2_TX: length 27.7
  TOP w0.152: v1(53.93,56.61) 59.64,56.61 60.35,57.32 U1.12 ; J2.3 40.81,50.31 v1(40.74,50.24)
  BOTTOM w0.152: v1(53.93,56.61) 47.11,56.61 v1(40.74,50.24)
N03518: length 3.2
  TOP w0.152: v1(58.25,63.18) 58.25,63.22 U1.7
  BOTTOM w0.152: C1.1 57.25,63.18 v1(58.25,63.18)
N03718: length 3
  TOP w0.254: v1(64.22,69.44) 64.1,69.32 U1.44
  BOTTOM w0.254: v1(64.22,69.44) 64.22,70.72 R1.1
N03722: length 6.9
  TOP w0.152: R2.1 69.77,56.59 69.57,56.59 69.55,56.61 66.37,56.61 65.6,57.38 U1.20
N09075: length 2.8
  TOP w0.254: U2.14 56.59,44.04 56.21,44.41 v1(56.21,44.42)
  BOTTOM w0.254: C10.1 56.21,44.91 v1(56.21,44.42)
N14044: length 3.6
  TOP w0.254: U6.16 34.51,61.57 v1(34.15,61.21)
  BOTTOM w0.254: R6.1 34.15,62.5 v1(34.15,61.21)
N15484: length 4.9
  TOP w0.152: L1.1 28.91,63.35 L2.1 31.44,63.85 U6.13
N15573: length 2.3
  TOP w0.152: C19.1 26.88,64.78 27.4,64.26 L1.2
N15577: length 14.4
  TOP w0.152: C19.2 C20.1
  TOP w0.381: C20.1 28.92,66.9 v1(30.08,66.9) ; RF1.1 v1(39.45,68.93)
  BOTTOM w0.381: v1(30.08,66.9) 34.24,66.9 36.28,68.93 v1(39.45,68.93)
N15609: length 4.9
  TOP w0.152: L3.1 L2.2 31.45,64.35 U6.12
N15655: length 9.5
  TOP w0.152: C23.1 C22.1 29.94,68.8 30.34,68.41 L3.2 31.83,67.52 31.83,65.37 32.35,64.85 U6.11
N16481: length 8.2
  TOP w0.152: U6.10 34.89,67.56 34.38,68.07 R5.1 33.84,69.22 33.33,69.22 C21.1 32.85,70.59 33.13,70.87 Y2.3
N16490: length 8.9
  TOP w0.152: U6.9 35.39,67.58 35.88,68.07 R5.2 36.43,69.22 36.93,69.22 C28.1 37.08,71.82 37.08,71.83 36.33,72.57 Y2.1
N18180: length 8.5
  TOP w0.508: R8.2 33.93,45.26 U7.3 ; R8.2 R9.1 ; R8.2 C32.2
N19990: length 2.4
  TOP w0.508: U8.4 v1(35.7,54.77)
  BOTTOM w0.508: C38.1 35.7,53.62 v1(35.7,54.77)
N023291: length 2.6
  TOP w0.152: Y1.1 53.76,62.78 53.02,62.03 53.02,61.78 R3.2
N24226: length 2.8
  TOP w0.635: R16.2 Q2.2
N24231: length 3.5
  TOP w0.635: R14.2 63.78,34.51 65.43,36.16 Q3.2
N24395: length 5
  TOP w0.254: R18.2 R21.1 69.67,30.96 69.66,30.97 Q2.1
N24464: length 3.5
  TOP w0.635: R15.1 63.78,29.18 65.43,27.53 Q1.2
N25221: length 4.8
  TOP w0.254: R24.2 R27.1 83.91,82.75 Q4.1
N25353: length 6.3
  TOP w0.635: M1.1 79.14,78.15 C40.2
  TOP w1.016: Q4.2 79.85,79.92 M1.1
N25363: length 6.3
  TOP w0.635: C41.2 21.89,79.11 M2.1
  TOP w1.016: Q5.2 20.12,79.82 M2.1
N25852: length 6.3
  TOP w0.635: C42.2 22.47,23.49 22.46,23.49 21,22.03 M3.1
  TOP w1.016: Q6.2 20.31,20.26 M3.1
N25929: length 6.3
  TOP w0.508: C43.2 77.97,21.03 M4.1
  TOP w1.016: Q7.2 79.74,20.32 M4.1
N30919: length 4.2
  TOP w0.254: R12.1 38.05,30.32 37.91,30.45 37.53,30.45 37.4,30.59 R13.1 36,30.59 35.87,30.72 35.54,30.72 35.41,30.59 R10.2
N237271: length 2.8
  TOP w0.381: R11.2 D4.2
N239990: length 3.9
  TOP w0.635: R14.1 59.77,34.51 58.8,33.54 RGB1.1
N239991: length 2.7
  TOP w0.635: RGB1.2 60.33,30.99 R16.1
N239992: length 4.6
  TOP w0.635: R15.2 58.75,29.18 57.95,29.98 RGB1.3
N241640: length 5
  TOP w0.254: Q1.1 69.64,26.65 69.67,26.62 R20.1 R17.2
N241820: length 5
  TOP w0.254: Q3.1 69.66,35.29 69.67,35.29 R22.1 R19.2
N249670: length 4.8
  TOP w0.254: Q5.1 17.29,83.88 R28.1 R25.2
N249850: length 4.8
  TOP w0.254: Q6.1 16.24,17.43 R29.1 R26.2
N250030: length 4.8
  TOP w0.254: R23.2 R30.1 82.56,16.25 Q7.1
N1269217: length 2
  TOP w0.254: U6.19 36.39,62.55 v1(36.67,62.83)
  BOTTOM w0.254: C27.1 36.67,63.46 v1(36.67,62.83)

## Copper pours and planes (outline as drawn; the poured copper is in the pictures)
GND on TOP: 1.92,1.94 5.59,10.46 27.96,49.97 5.59,89.48 1.92,98 10.44,94.33 49.95,71.96 89.46,94.33 97.98,98 94.31,89.48 71.95,49.97 94.31,10.46 97.98,1.94 89.46,5.61 49.95,27.98 10.44,5.61 ; 25 cut-outs
GND on BOTTOM: 1.92,1.94 5.59,10.46 27.96,49.97 5.59,89.48 1.92,98 10.44,94.33 49.95,71.96 89.46,94.33 97.98,98 94.31,89.48 71.95,49.97 94.31,10.46 97.98,1.94 89.46,5.61 49.95,27.98 10.44,5.61 ; 9 cut-outs
GND_SIGNAL on TOP (solid shape): 39.07,71.96 39.07,71.37 38.17,71.37 37.53,72.01 37.53,72.02 37.31,72.24 37.31,72.66 38.37,72.66
GND_SIGNAL on TOP (solid shape): 37.53,70.73 37.53,70.46 36.74,69.68 36.24,69.68 36.02,69.46 34.25,69.46 34.03,69.68 33.52,69.68 33.48,69.72 33.46,69.83 33.55,69.89 35.11,69.89 35.11,71.59 36.66,71.59
GND_SIGNAL on TOP (solid shape): 28.13,66.1 29.69,66.1 29.69,66.32 30.08,66.32 30.11,66.33 30.14,66.31 30.16,66.27 30.16,66.13 30.48,66.13 30.48,65.63 30.16,65.63 30.16,63.81 29.68,63.81 29.68,64.12 27.85,64.12 27.85,64.45 27.66,64.65 27.66,66.43 28.13,66.43
GND_SIGNAL on TOP (solid shape): 29.78,60.01 31.34,60.01 31.34,60.15 31.68,60.15 31.68,60.01 32.82,60.01 33.44,59.39 33.46,59.28 33.36,59.21 32.83,59.21 32.32,58.71 29.82,58.71 29.75,58.64 28.27,58.64 27.81,59.87 27.82,59.96 27.9,60.01 29.44,60.01 29.44,60.15 29.78,60.15
GND_SIGNAL on TOP (solid shape): 37.05,62.49 37.13,62.52 37.2,62.49 37.38,62.36 37.59,62.32 38.63,62.32 39.07,61.88 39.07,61.31 38.18,60.42 37.12,60.42 36.84,60.7 36.9,60.84 36.93,61 36.93,62.15 36.92,62.22 36.9,62.34 37.03,62.47
GND_SIGNAL on TOP (solid shape): 34.37,60.76 34.4,60.76 34.43,60.73 34.82,60.47 35.27,60.62 35.34,60.65 35.41,60.62 36.02,60.01 36.05,59.93 36.02,59.86 35.54,59.44 34.28,60.69 34.33,60.74
GND_SIGNAL on TOP (solid shape): 32.59,63.39 32.68,63.33 32.66,63.22 32.54,62.67 32.99,62.32 33.03,62.32 33.03,62.18 32.42,61.57 31.68,61.57 31.68,61.42 31.34,61.42 31.34,61.57 29.78,61.57 29.78,61.42 29.44,61.42 29.44,61.57 27.87,61.57 27.87,60.24 27.79,60.14 27.68,60.21 27.26,61.31 27.26,62.56 29.68,62.56 29.68,62.9 30.16,62.9 30.16,62.57 31.72,62.57 31.72,63.36 31.75,63.39
GND_SIGNAL on TOP (solid shape): 35.15,71.85 32.95,71.85 32.95,71.33 32.74,71.33 32.74,71.37 31.18,71.37 31.18,69.81 32.09,69.81 33.14,68.76 33.6,68.76 33.6,67.89 33.92,67.89 33.92,67.88 34.44,67.37 34.44,66.97 34.38,66.84 34.36,66.7 34.36,65.55 34.37,65.49 34.34,65.41 34.25,65.38 34.19,65.38 33.04,65.38 32.91,65.36 32.79,65.31 32.77,65.31 32.54,65.31 32.29,65.56 32.29,67.71 31.72,68.27 31.72,69.19 30.2,69.19 30.13,69.26 29.68,69.26 29.68,69.58 29.35,69.58 29.35,69.93 29.68,69.93 29.68,71.49 28.12,71.49 28.12,69.93 28.44,69.93 28.44,69.58 28.12,69.58 28.12,68.02 29.68,68.02 29.68,68.34 29.76,68.34 30.15,67.95 30.16,67.95 30.16,67.52 30.14,67.48 30.11,67.47 30.08,67.47 29.69,67.47 29.69,67.67 28.13,67.67 28.13,67.34 27.66,67.34 27.66,67.67 27.26,67.67 27.26,72.1 28.32,73.17 35.15,73.17
GND_SIGNAL on TOP (solid shape): 39.07,69.35 38.88,68.93 39.07,68.5 39.07,65.82 38.63,65.38 37.59,65.38 37.53,65.38 37.45,65.41 37.42,65.49 37.43,65.55 37.43,65.67 37.85,65.67 38,65.81 38.07,66.35 37.58,66.58 37.57,66.58 37.43,66.58 37.43,66.7 37.17,67.15 36.64,67.17 36.32,67.22 36.02,67.08 35.91,67.06 35.85,67.15 35.85,67.39 36.35,67.89 36.66,67.89 36.66,68.76 37.12,68.76 38.17,69.81 39.07,69.81
GND_SIGNAL on BOTTOM (solid shape): 37.16,72.87 38.31,72.87 38.93,72.14 38.94,72.04 38.85,71.98 37.46,71.98 36.23,73.2 36.21,73.31 36.31,73.37 36.78,73.37
GND_SIGNAL on BOTTOM (solid shape): outline of 215 points within 27.93,58.64 39.07,72.36
VCC_3.3V on TOP (solid shape): 41.61,59.28 41.61,56.99 40.85,56.23 36.4,56.23 36.28,56.36 36.28,59.15 37.16,60.04 40.85,60.04
VCC_5V on TOP (solid shape): 34.75,57.12 34.75,56.38 33.33,56.38 33.33,55.06 34.75,55.06 34.75,54.07 37.8,54.07 38.52,53.51 38.52,53.25 38.86,53.25 38.94,53.18 43.9,53.18 44.4,52.67 44.4,51.78 43.9,51.4 38.82,51.4 37.8,52.53 37.8,52.55 37.78,52.55 37.67,52.67 31.58,52.67 31.07,53.31 31.07,57.24 31.45,57.5 34.37,57.5
VCC_BATT on TOP: 29.04,35.15 28.91,34.89 27.51,30.57 26.88,30.32 25.99,30.32 25.61,30.96 26.24,33.11 27.13,35.27 27.35,35.85 27.36,35.85 27.55,36.17 27.62,36.54 27.62,36.55 28.4,38.58 29.29,39.46 31.32,39.46 31.96,37.94 30.71,36.8 30.69,36.8 29.42,36.04
VCC_IN on TOP (solid shape): 41.86,40.1 41.74,39.97 40.21,39.97 39.32,39.08 39.32,37.43 39.83,36.92 39.83,35.15 35.51,35.15 35.51,36.16 33.61,37.56 33.61,40.1 37.67,40.1 38.69,41.12 41.86,41.12
VCC_MO on BOTTOM: 27.77,42.77 32.34,42.77 32.85,42.26 32.85,33.88 32.08,33.11 27.89,33.11 27.26,33.75 27.26,42.26
N18033 on TOP (solid shape): 41.86,44.29 41.86,42.89 40.97,42 35.53,42 35.53,43.42 35.77,43.66 36.66,43.66 39.07,46.07 40.09,46.07
N18173 on TOP (solid shape): 31.83,50.64 31.86,50.69 31.92,50.68 31.96,50.64 39.83,50.64 40.18,50.29 40.18,50.26 40.19,50.16 40.21,50.06 40.21,47.47 39.83,47.08 34.24,47.08 31.83,49.5
GND on TOP (solid shape): 56.61,58.5 56.54,58.32 56.36,58.24 55.56,58.51 55.92,58.95 56.36,59.31
U2_TX on TOP (solid shape): 42.51,50.31 41.4,49.92 41.07,50.25 41.05,50.31 41.07,50.36 41.4,50.7
N15577 on TOP (solid shape): 40.48,68.93 39.93,68.18 39.29,68.83 39.26,68.93 39.29,69.03 39.93,69.68
N25221 on TOP (solid shape): 84.41,82.76 84.39,82.18 83.43,82.15 83.32,82.23 83.34,82.36 84.39,83.32
N249670 on TOP (solid shape): 17.86,84.36 17.89,83.4 17.81,83.29 17.68,83.32 16.73,84.36 17.28,84.39
N249850 on TOP (solid shape): 16.73,18.04 16.83,17.95 16.81,17.82 15.77,16.87 15.74,17.42 15.77,18
N250030 on TOP (solid shape): 81.96,16.74 82.04,16.85 82.18,16.82 83.13,15.78 82.58,15.75 82,15.78

Small or netless copper shapes (teardrops, artwork), in the pictures only: 128 on TOP, 8 on BOTTOM

## Text on the board
BOTTOM: 2 | 3 | 4
User.Comments: CR_MOTOR_2 | CR_MOTOR_3 | CR_MOTOR_4
